# EAGLE board LME49810 (EAGLE 5.07)
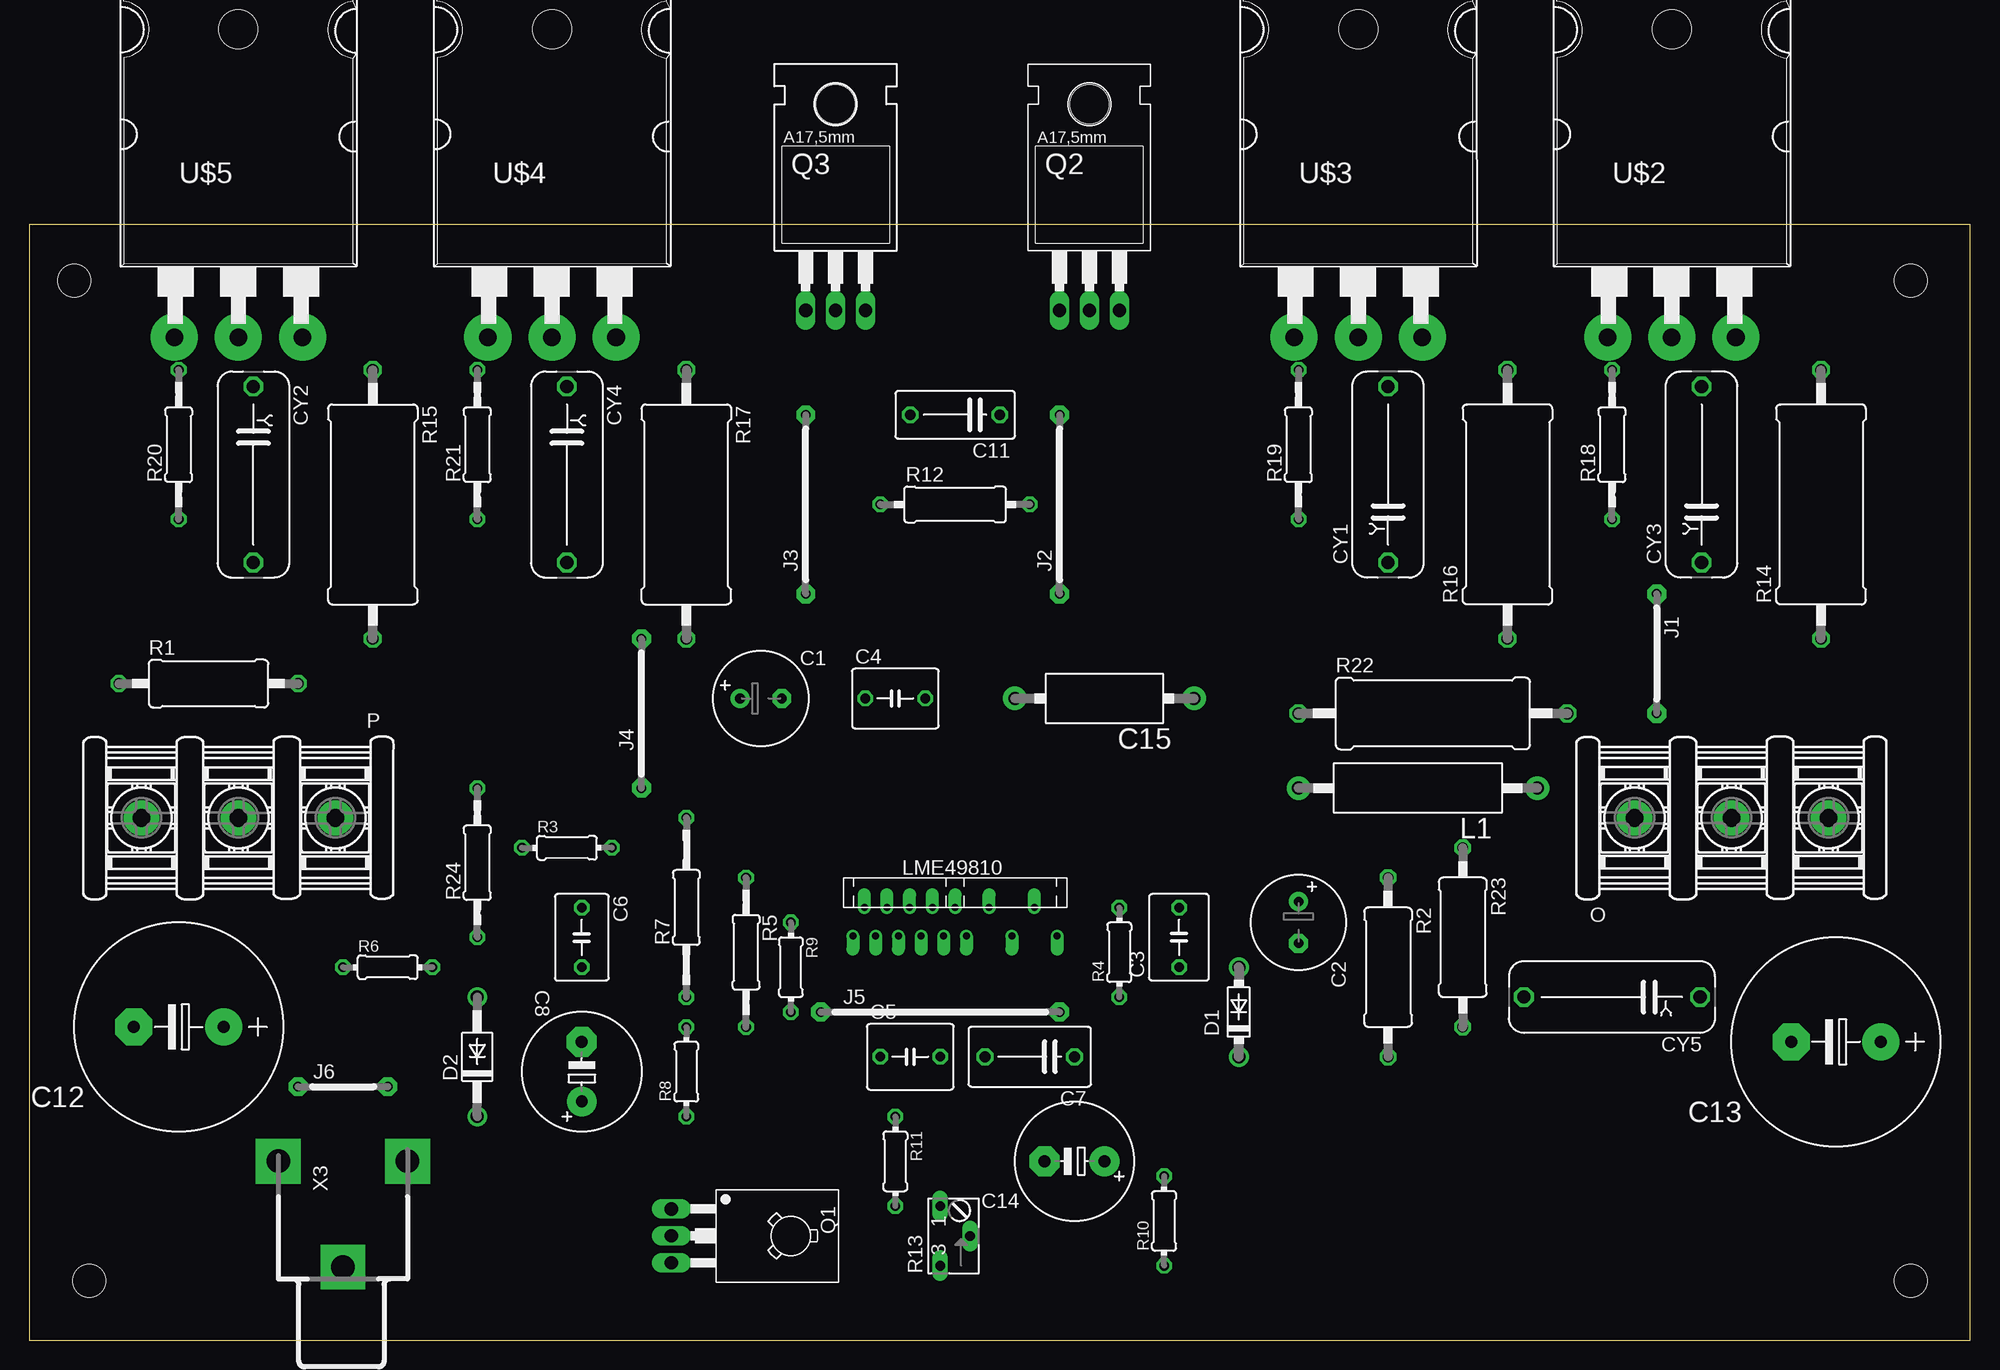
[diagram p0: board, top side]
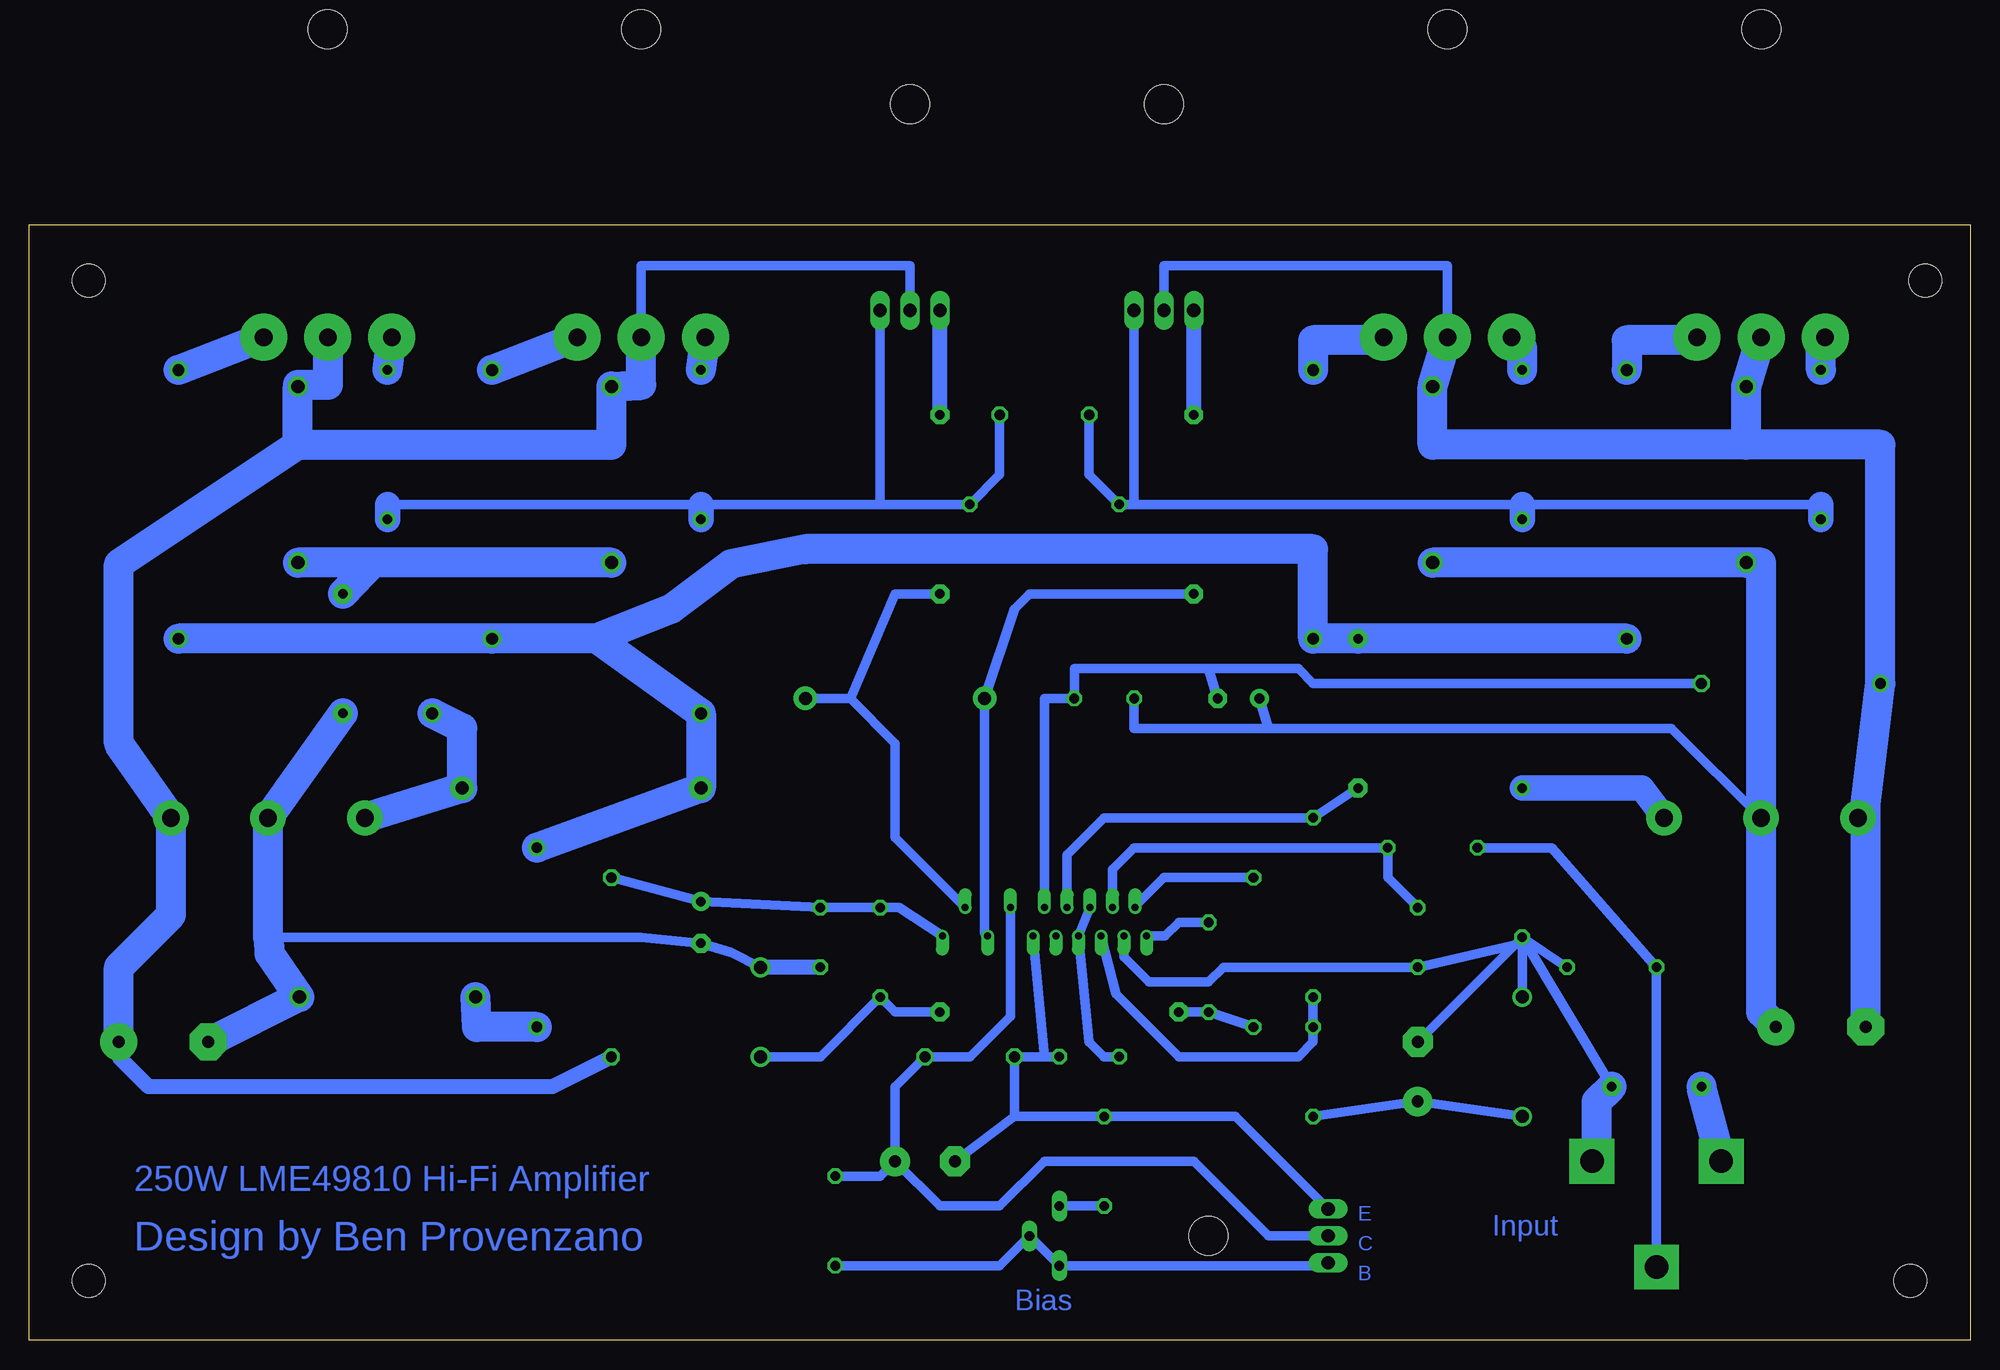
[diagram p1: board, bottom side, seen from below]

Size 165.08 x 94.92 mm. Coordinates in mm from the lower left corner, seen from the top.
Outline: 0,0 165.08,0 165.08,94.92 0,94.92 0,0
Copper layers (1*16): Top 0.035mm / dielectric 1.5mm / Bottom 0.035mm
Design rules "default": minimum track width 10mil, minimum drill 24mil, track to track 8mil, track to pad 8mil, pad to pad 8mil, via to via 8mil, smd to smd 8mil, copper to edge 40mil, drill to drill 8mil, minimum pad ring 10mil, minimum via ring 8mil, stop-mask expansion 4mil, vias tented up to drill 0mil, thermal gap 10mil
Holes 2.8 mm at 5.08,5.08 3.81,90.17 160.02,90.17 160.02,5.08

## Footprints (pad centres in the part's own frame; a part is rotated, then mirrored left to right if it is on the bottom)
E3,5-8 = drill 0.813 pad 1.6 round: + -1.778,0 | drill 0.813 pad 1.6 octagon: - 1.778,0
C050-050X075 = drill 0.813 octagon: 1 -2.54,0; 2 2.54,0
C050-055X075 = drill 0.813 octagon: 1 -2.54,0; 2 2.54,0
C050-045X075 = drill 0.813 octagon: 1 -2.54,0; 2 2.54,0
C075-052X106 = drill 0.914 octagon: 1 -3.81,0; 2 3.81,0
E5-10,5 = drill 1.016 pad 2.54 round: + -2.54,0 | drill 1.016 pad 2.54 octagon: - 2.54,0
C075-042X103 = drill 0.914 octagon: 1 -3.81,0; 2 3.81,0
E7,5-18 = drill 1.016 pad 3.15 round: + -3.81,0 | drill 1.016 pad 3.15 octagon: - 3.81,0
CA0001 = drill 1.1 pad 2 round: 1 -7.62,0; 2 7.62,0
YC15B6 = drill 1.118 octagon: 1 -7.493,0; 2 7.493,0
DO41-7.6 = drill 1.1 pad 1.7 round: A 3.81,0; C -3.81,0
DO41-10 = drill 1.118 round: A 5.08,0; C -5.08,0
10 = drill 0.813 pad 1.6 octagon: 1 -5.08,0; 2 5.08,0
15 = drill 0.813 pad 1.6 octagon: 1 -7.62,0; 2 7.62,0
12 = drill 0.813 pad 1.6 octagon: 1 -6.35,0; 2 6.35,0
20 = drill 0.813 pad 1.6 octagon: 1 -10.16,0; 2 10.16,0
07 = drill 0.813 pad 1.6 octagon: 1 -3.81,0; 2 3.81,0
CA0002 = drill 1.1 pad 2 round: 1 -10.16,0; 2 10.16,0
5202-03-N-02 = drill 1.5 pad 3 round: 1 -8.25,0; 2 0,0; 3 8.25,0
TO126 = drill 1.118 long: 1 -2.286,-5.08; 2 0,-5.08; 3 2.286,-5.08 | hole 3.302: 0,5.08
TO220 = drill 1.118 long: 1 -2.54,-6.35; 2 0,-6.35; 3 2.54,-6.35 | hole 3.302: 0,11.176
0411/15 = drill 0.914 octagon: 1 -7.62,0; 2 7.62,0
0204/7 = drill 0.813 octagon: 1 -3.81,0; 2 3.81,0
0207/12 = drill 0.813 octagon: 1 -6.35,0; 2 6.35,0
0207/15 = drill 0.813 octagon: 1 -7.62,0; 2 7.62,0
0309/12 = drill 0.813 octagon: 1 -6.35,0; 2 6.35,0
B64W = drill 0.813 long: A 2.54,0; E -2.54,0; S 0,-2.54
P0817/22 = drill 1.016 octagon: 1 -11.43,0; 2 11.43,0
0617/22 = drill 1.016 octagon: 1 -11.43,0; 2 11.43,0
TB15A = drill 0.6 pad 1.016 offset: P$1 -8.685,-2.43; P$2 -7.72,0; P$3 -6.755,-2.43; P$4 -5.79,0; P$5 -4.825,-2.43; P$6 -3.86,0; P$7 -2.895,-2.43; P$8 -1.93,0; P$9 -0.965,-2.43; P$10 0,0; P$11 0.965,-2.43; P$12 2.895,0; P$13 4.825,-2.43; P$14 6.755,0; P$15 8.685,-2.43
TO-264 = drill 1.5 pad 4 round: B -5.45,-6.096; E 5.45,-6.096 | drill 1.499 pad 4 round: C 0,-6.096 | hole 3.3: 0,20.09
736880-49 = drill 2 pad 3.81 square: 1 -3.92,0; 2 5.08,5.5; 2@2 5.08,-5.5

## Placement (x,y rotation side)
C1  10uF  [E3,5-8]  62.23,54.61 0 top
C2  10uF  [E3,5-8]  107.95,35.56 270 top
C3  .1  [C050-050X075]  97.79,34.29 90 top
C4  .1  [C050-050X075]  73.66,54.61 0 top
C5  22pF  [C050-055X075]  74.93,24.13 0 top
C6  470pF  [C050-045X075]  46.99,34.29 270 top
C7  .1  [C075-052X106]  85.09,24.13 180 top
C8  470uF  [E5-10,5]  46.99,22.86 90.1 top
C11  .1  [C075-042X103]  78.74,78.74 180 top
C12  100uF  [E7,5-18]  12.7,26.67 180 top
C13  100uF  [E7,5-18]  153.67,25.4 180 top
C14  470uF  [E5-10,5]  88.9,15.24 180 top
C15  2.2k  [CA0001]  91.44,54.61 180 top
CY1  .1  [YC15B6]  115.57,73.66 90 top
CY2  .1  [YC15B6]  19.05,73.66 270 top
CY3  .1  [YC15B6]  142.24,73.66 90 top
CY4  .1  [YC15B6]  45.72,73.66 270 top
CY5  .1  [YC15B6]  134.62,29.21 180 top
D1  5V  [DO41-7.6]  102.87,27.94 90 top
D2  1N4148  [DO41-10]  38.1,24.13 90 top
J1  J10MM  [10]  138.43,58.42 270 top
J2  J15MM  [15]  87.63,71.12 90 top
J3  J15MM  [15]  66.04,71.12 90 top
J4  J12MM  [12]  52.07,53.34 90 top
J5  J20MM  [20]  77.47,27.94 0 top
J6  J7MM  [07]  26.67,21.59 0 top
L1  3uH  [CA0002]  118.11,46.99 180 top
O  Out  [5202-03-N-02]  144.78,44.45 0 top
P  Power  [5202-03-N-02]  17.78,44.45 180 top
Q1  BD139  [TO126]  59.69,8.89 270 top
Q2  MJE15030  [TO220]  90.17,93.98 0 top
Q3  MJE15031  [TO220]  68.58,93.98 0 top
R1  10  [0411/15]  15.24,55.88 0 top
R2  10  [0411/15]  115.57,31.75 270 top
R3  1k  [0204/7]  45.72,41.91 0.1 top
R4  22k  [0204/7]  92.71,33.02 90 top
R5  33k  [0207/12]  60.96,33.02 270 top
R6  33k  [0204/7]  30.48,31.75 0 top
R7  5.6k  [0207/15]  55.88,36.83 90 top
R8  240  [0204/7]  55.88,22.86 90 top
R9  1k  [0204/7]  64.77,31.75 270 top
R10  1.2k  [0204/7]  96.52,10.16 90 top
R11  330  [0204/7]  73.66,15.24 270 top
R12  180  [0309/12]  78.74,71.12 0 top
R13  200  [B64W]  77.47,8.89 90 top
R14  .4  [P0817/22]  152.4,71.12 90 top
R15  .4  [P0817/22]  29.21,71.12 270 top
R16  .4  [P0817/22]  125.73,71.12 90 top
R17  .4  [P0817/22]  55.88,71.12 270 top
R18  10  [0207/12]  134.62,76.2 90 top
R19  10  [0207/12]  107.95,76.2 90 top
R20  10  [0207/12]  12.7,76.2 90 top
R21  10  [0207/12]  38.1,76.2 90 top
R22  10  [0617/22]  119.38,53.34 0 top
R23  10  [0411/15]  121.92,34.29 270 top
R24  0  [0207/12]  38.1,40.64 90 top
U$1  LME49810  [TB15A]  78.74,36.83 0 top
U$2  2SC5200  [TO-264]  139.7,91.44 0 top
U$3  2SC5200  [TO-264]  113.03,91.44 0 top
U$4  2SA1943  [TO-264]  44.45,91.44 0 top
U$5  2SA1943  [TO-264]  17.78,91.44 0 top
X3  Input  [736880-49]  26.67,10.16 90 top

## Library data of the parts
C1-C8 C11-C14 CY1-CY5 R1-R12 R14-R24 = resistor
C15 L1 = resistor-power
D1 D2 = diode
J1-J6 = jumper
O P = con-ebyelectro
Q1 Q2 = transistor-npn
Q3 = transistor-pnp
R13 = pot
U$1 = LME49810
U$2-U$5 = Rudi_TO264
X3 = con-conrad

## Nets
+5V: J5.1 R5.2 R9.2
AGND: C6.2 C8.- D2.A J6.2 R6.2 R24.1 U$1.P$3
GND: C2.- C3.1 C13.- CY5.1 D1.A J1.2 O.2
N$2: J2.2 Q2.1
N$3: R9.1 U$1.P$1
N$4: J3.2 Q3.1
N$6: C1.- C4.2 R1.2 U$1.P$10
N$7: C5.1 U$1.P$6 U$1.P$7
N$8: P.1 R24.2
N$9: J6.1 X3.2
N$10: J4.1 R7.2 U$1.P$8
N$11: C15.2 J3.1 U$1.P$13
N$12: C6.1 R3.2 U$1.P$4
N$13: R3.1 R6.1 X3.1
N$14: R5.1 U$1.P$2
N$17: C11.1 Q2.3 R12.2 R18.1 R19.1
N$18: C11.2 Q3.3 R12.1 R20.1 R21.1
N$19: R14.2 U$2.E
N$20: R16.2 U$3.E
N$21: R15.1 U$5.E
N$22: R17.1 U$4.E
N$23: D1.C J5.2 R4.1
N$24: CY5.2 R23.2
N$25: R18.2 U$2.B
N$26: R19.2 U$3.B
N$27: R21.2 U$4.B
N$28: R20.2 U$5.B
N$29: C8.+ D2.C R8.1
N$30: L1.1 O.1 R22.2
N$31: R7.1 R8.2 U$1.P$5
N$32: C15.1 J2.1 U$1.P$14
N$33: J4.2 L1.2 R14.1 R15.2 R16.1 R17.2 R22.1 R23.1
N$34: C2.+ C3.2 R2.1 R4.2 U$1.P$15
N$36: Q1.3 R10.1 R13.E R13.S
N$37: R11.2 R13.A
N$38: C7.1 C14.+ Q1.2 R10.2 U$1.P$12
N$42: C5.2 C7.2 C14.- Q1.1 R11.1 U$1.P$11
PE: CY1.1 CY3.1 J1.1
V+: C13.+ CY1.2 CY3.2 O.3 Q2.2 R2.2 U$2.C U$3.C
V-: C12.- CY2.1 CY4.1 P.3 Q3.2 R1.1 U$4.C U$5.C
VSS: C1.+ C4.1 C12.+ CY2.2 CY4.2 P.2

## Tracks (layer width: path | path; a pad name or v marks a point on that pad's centre or on a via)
+5V
  Bottom 0.813: R5.2 R9.2 J5.1
AGND
  Bottom 0.813: R24.1 R6.2 | R24.1 D2.A | R24.1 C8.- | R24.1 38.52,33.69 C6.2 63.5,31.75 64.77,30.48 69.85,30.48 71.98,32.62 U$1.P$3 | J6.2 R24.1
  Bottom 2.54: J6.2 31.75,20.32 31.75,15.24
GND
  Bottom 0.813: D1.A 105.41,33.02 C2.- 113.03,34.29 144.78,34.29
  Bottom 1.27: C3.1 D1.A
  Bottom 2.54: J1.2 O.2 144.78,34.29 144.65,32.89 CY5.1 149.73,25.4 C13.-
N$2
  Bottom 1.27: J2.2 Q2.1
N$3
  Bottom 0.813: R9.1 67.31,35.56 68.47,34.4 U$1.P$1
N$4
  Bottom 1.27: J3.2 Q3.1
N$6
  Bottom 0.813: 64.77,57.15 C1.- | R1.2 55.88,55.88 57.15,57.15 64.77,57.15 | 64.77,57.15 66.04,57.15 76.2,57.15 C4.2 78.74,54.61 U$1.P$10
N$7
  Bottom 0.813: U$1.P$6 U$1.P$7 74.93,25.4 73.66,24.13 C5.1
N$8
  Bottom 2.184: R24.2 27.94,46.99 P.1
N$9
  Bottom 2.54: X3.2 J6.1
N$10
  Bottom 0.813: J4.1 R7.2 73.66,44.45 76.81,41.3 U$1.P$8
N$11
  Bottom 0.813: J3.1 80.01,63.5 81.28,62.23 C15.2 83.82,34.66 U$1.P$13
N$12
  Bottom 0.813: C6.1 49.53,39.37 | 49.53,39.37 R3.2 | 49.53,39.37 | 49.53,39.37 R3.2 71.12,41.91 72.95,40.08 U$1.P$4
N$13
  Bottom 0.813: X3.1 R6.1 35.56,41.91 R3.1
N$14
  Bottom 0.813: R5.1 68.58,39.37 71.02,36.93 U$1.P$2
N$17
  Bottom 0.813: 92.71,71.12 R12.2 82.55,73.66 C11.1 | 92.71,71.12 Q2.3 | 92.71,71.12 107.95,71.12 134.62,71.12
  Bottom 2.184: 134.62,71.12 R18.1 | 107.95,71.12 R19.1
N$18
  Bottom 0.813: C11.2 74.93,73.66 R12.1 71.12,71.12 | 71.12,71.12 Q3.3 | 71.12,71.12 38.1,71.12 12.7,71.12
  Bottom 2.184: 38.1,71.12 R21.1 | R20.1 12.7,71.12
N$19
  Bottom 2.54: U$2.E R14.2
N$20
  Bottom 2.54: U$3.E R16.2
N$21
  Bottom 2.54: U$5.E 23.48,85.09 29.21,85.09 R15.1
N$22
  Bottom 2.54: U$4.E 50.15,85.09 55.88,85.09 R17.1
N$23
  Bottom 0.813: J5.2 91.44,27.94 R4.1 97.79,24.13 D1.C
N$24
  Bottom 2.54: R23.2 127,26.67 CY5.2
N$25
  Bottom 2.54: 134.62,84.97 U$2.B R18.2
N$26
  Bottom 2.54: R19.2 U$3.B
N$27
  Bottom 2.54: U$4.B 38.1,84.44 R21.2
N$28
  Bottom 2.54: U$5.B 12.7,84.97 R20.2
N$29
  Bottom 0.813: D2.C C8.+ R8.1
N$30
  Bottom 2.54: R22.2 128.27,52.07 L1.1 O.1
N$31
  Bottom 0.813: R8.2 R7.1 55.88,25.4 57.15,24.13 67.31,24.13 72.65,29.47 U$1.P$5
N$32
  Bottom 0.813: J2.1 91.44,63.5 95.25,54.61 | 95.25,54.61 C15.1 | 95.25,54.61 91.44,50.8 91.44,42.77 U$1.P$14
N$33
  Bottom 2.54: R15.2 J4.2 R17.2 55.88,67.31 99.06,67.31 105.41,66.04 110.49,62.23 116.84,59.69 | R14.1 R16.1 116.84,59.69 | 116.84,59.69 R22.1 L1.2 R23.1
N$34
  Bottom 0.813: R2.1 C2.+ C3.2 R4.2 91.12,36.83 U$1.P$15
N$36
  Bottom 0.813: Q1.3 54.86,6.35 R13.E R13.S 82.55,6.35 R10.1
N$37
  Bottom 0.813: R11.2 R13.A
N$38
  Bottom 0.813: U$1.P$12 81.64,27.59 85.09,24.13 C7.1 91.44,21.59 C14.+ | C14.+ 92.71,13.97 R10.2 | Q1.2 59.69,8.89 66.04,15.24 78.74,15.24 82.55,11.43 87.63,11.43 C14.+
N$42
  Bottom 0.813: 78.74,24.13 C5.2 | 78.74,24.13 U$1.P$11 | 78.74,24.13 C7.2 81.28,19.05 | 81.28,19.05 C14.- | Q1.1 62.48,19.05 R11.1 81.28,19.05
PE
  Bottom 2.54: CY1.1 135.89,66.17 | 135.89,66.17 CY3.1 | 135.89,66.17 J1.1
V+
  Bottom 0.813: Q2.2 90.17,91.44 113.03,91.44 U$3.C
  Bottom 1.27: R2.2 120.65,21.59 154.94,21.59 157.48,24.13 C13.+
  Bottom 2.54: C13.+ 157.48,31.75 153.03,36.2 O.3 157.48,50.8 157.48,66.04 142.24,76.2 | U$3.C 113.03,81.28 CY1.2 115.57,76.2 142.24,76.2 | 142.24,76.2 CY3.2 142.24,81.28 139.7,81.28 U$2.C
V-
  Bottom 0.254: 8.89,44.45 P.3
  Bottom 0.813: Q3.2 68.58,91.44 44.45,91.44 U$4.C
  Bottom 2.54: C12.- 8.89,44.45 8.89,45.72 R1.1 7.62,76.2 19.05,76.2 | U$5.C CY2.1 19.05,76.2 | U$4.C CY4.1 45.72,76.2 19.05,76.2
VSS
  Bottom 0.813: C4.1 71.12,52.07 59.69,52.07 | 59.69,52.07 C1.+ | P.2 25.4,52.07 59.69,52.07
  Bottom 2.54: C12.+ 17.78,27.94 P.2 17.78,66.17 CY2.2 CY4.2

## Text on the board
Bottom: 250W LME49810 Hi-Fi Amplifier | E | Input | C | Design by Ben Provenzano | B | Bias